# Altium PCB kipas.PcbDoc
Units mm, origin at the board's own origin, x right, y up, seen from the top; angles counter-clockwise.
Board outline 152.4 x 101.6 mm, 2 copper layers (Top Layer, Bottom Layer); 6 components, 15 nets, 23 pads, 0 vias.
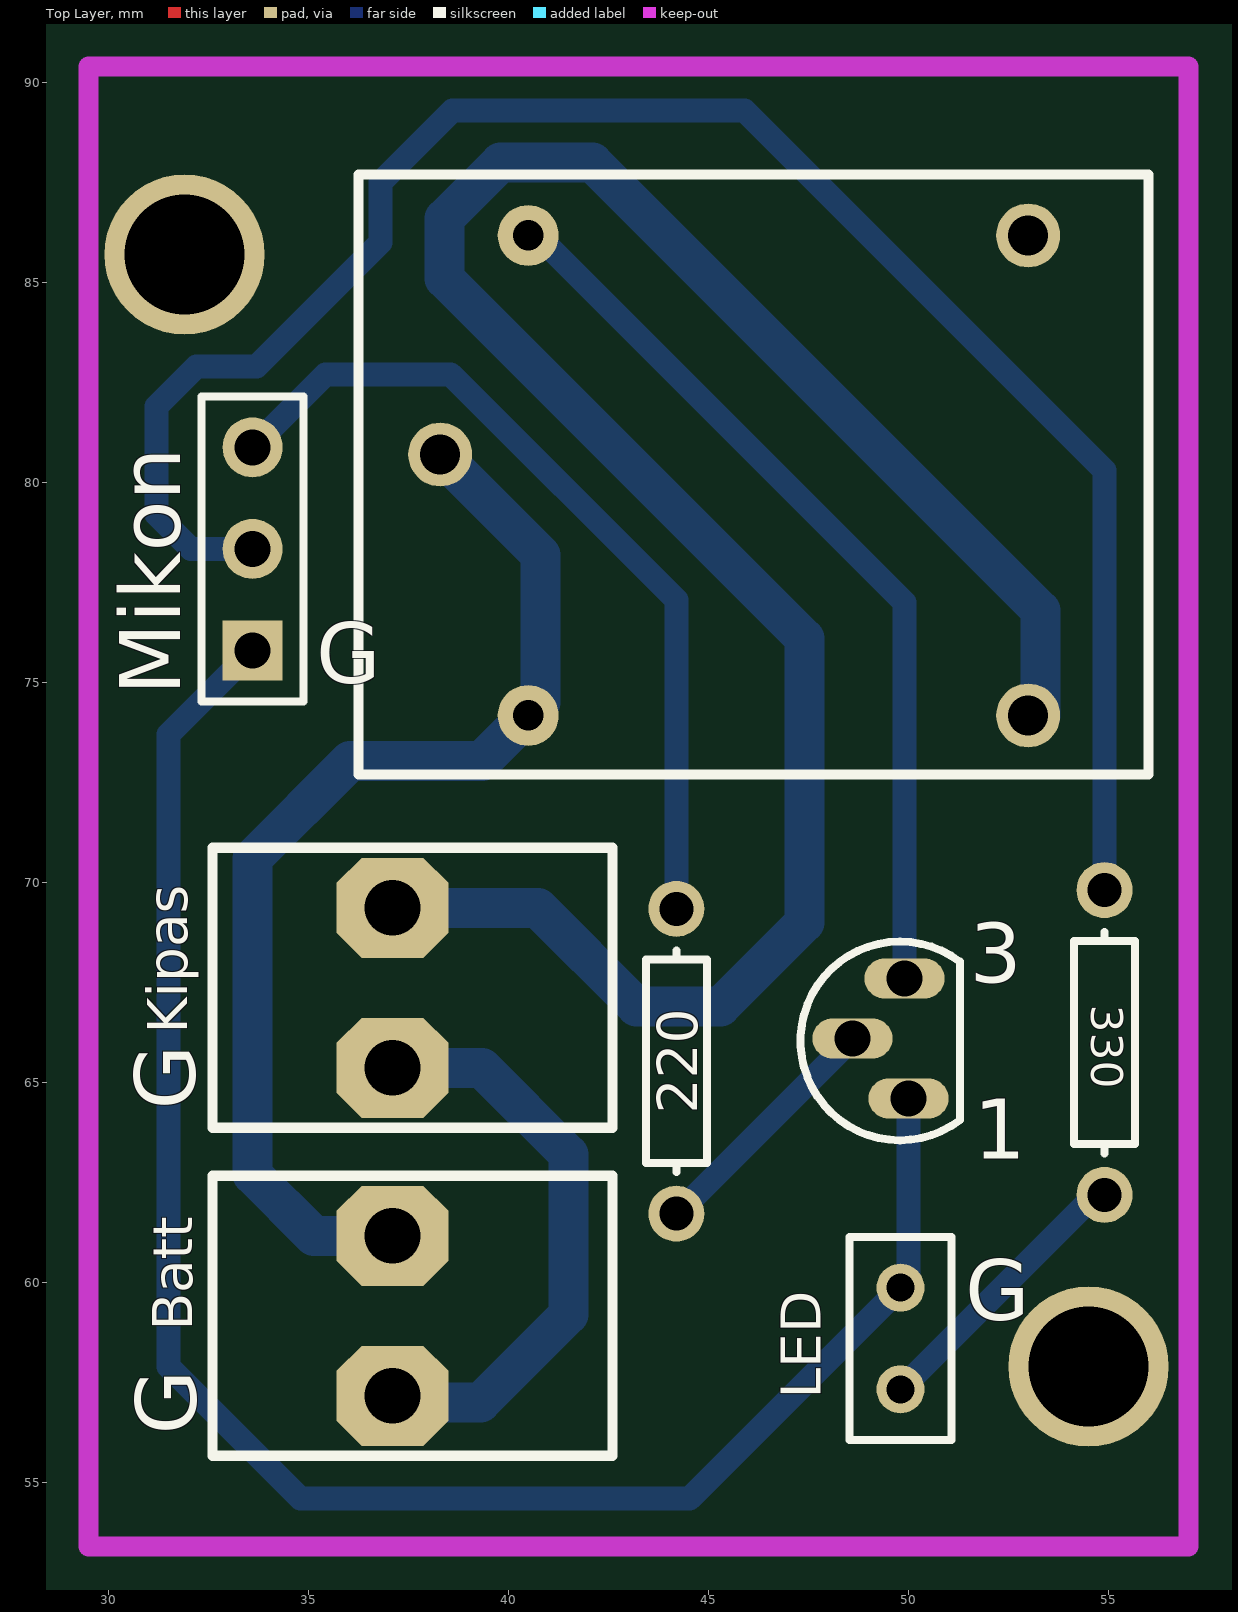
[diagram p0: Top Layer view]
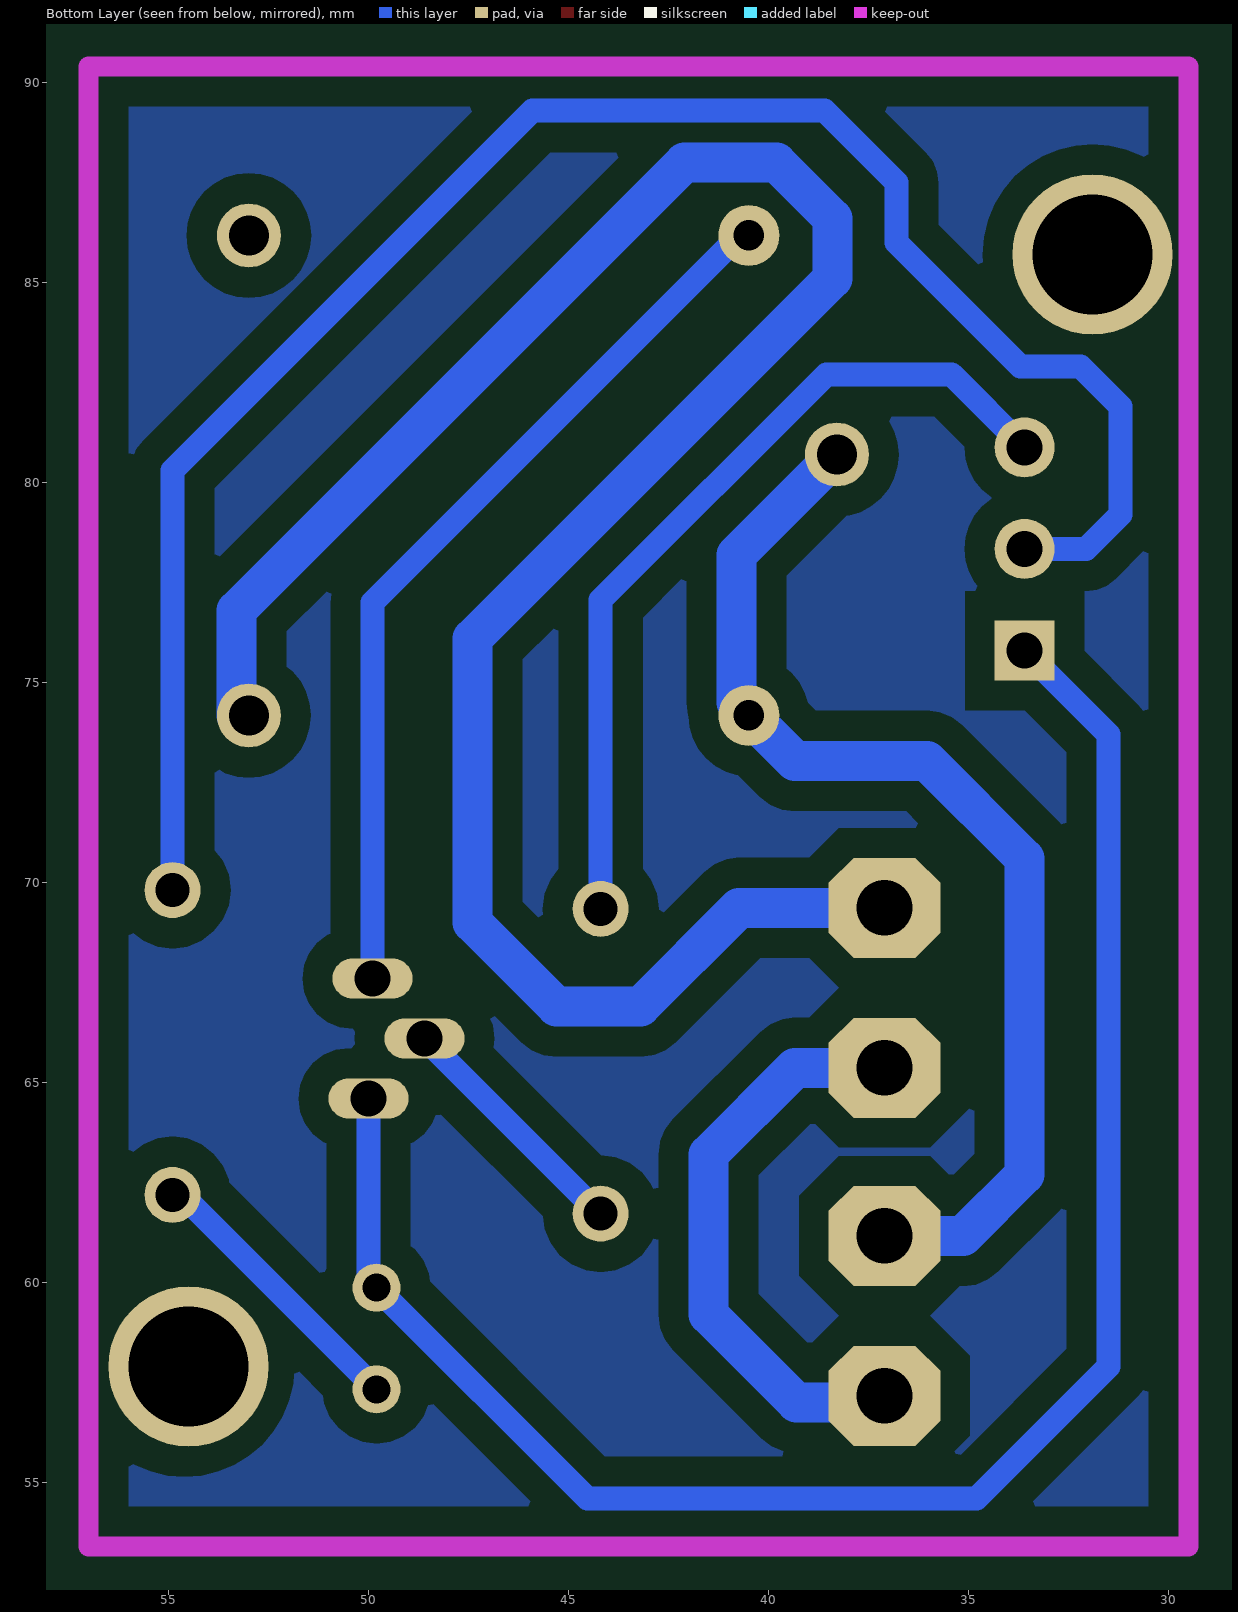
[diagram p1: Bottom Layer view, seen from below]

## Layer stack, top to bottom
Top Solder: solder mask 0.0102, Solder Resist, Dk 3.5
Top Layer: signal copper 0.0356
Dielectric1: dielectric 0.32, FR-4, Dk 4.8
Bottom Layer: signal copper 0.0356
Bottom Solder: solder mask 0.0102, Solder Resist, Dk 3.5

## Board outline
25.4,25.4 177.8,25.4 177.8,127 25.4,127

## Design rules (kind name [scope] priority, off if disabled: settings)
Clearance [All] p1: gap=0.5
PolygonConnect [All] p1: connectstyle=Relief reliefconductorwidth=0.254 reliefentries=4 polygonreliefangle="90 Angle" airgapwidth=0.254
RoutingVias [All] p1: holewidth=0.711 width=1.27 viastyle="Through Hole" minholewidth=0.711 minwidth=1.27 maxholewidth=0.711 maxwidth=1.27
SilkToSolderMaskClearance SilkscreenOverComponentPads [IsPad] p1: minsilkscreentomaskgap=0.254 clearancetoexposedcopper=TRUE
SolderMaskExpansion [All] p1: expansion=0.102
Width [All] p1: maxlimit=1 minlimit=0.6 preferedwidth=0.6 minimp=50.000000 maximp=50.000000 favimp=50.000000
28 further rules are at their usual default settings.

## Components (designator, comment, footprint, x,y, rotation, side; value= is the part's Value field where it differs from the comment)
220 "Res1" AXIAL-0.3 44.196,65.532 r270 top (schematic designator R1)
Batt "" BIGCON2 37.1,59.2 r90 top
Kipas "" BIGCON2 37.1,67.4 r90 top
LED "Comment" RAD-0.1 49.8,58.6 r90 top
Mikon "mikon-driver" HDR1X3 33.6,75.8 r90 top (schematic designator P2)
? "Comment" AXIAL-0.3 54.9,66 r90 top

## Footprints (in the part's own frame and the unit in brackets; to place one, negate y for a bottom-side part, rotate by r counter-clockwise, add the part's x,y. Pads: shape width x height; smd on the part's side, far side on the other; paste and mask are expansions set on the pad)
AXIAL-0.3 [mm] "Axial Device, Thru-Hole; 2 Leads; 0.3 in Pin Spacing"
  round 1.4 hole 0.85: 1(-3.81,0) 2(3.81,0)
  silkscreen extent -2.77,-0.76 2.77,0.76
BIGCON2 [mil]
  oct 98.42x110 hole 55: 1(-80,0) 2(77.48,0)
  silkscreen extent -139,-217 137,177
HDR1X3 [mm] "Connector; Header; 3 Position"
  rect 1.5x1.5 hole 0.9: 1(0,0)
  round 1.5 hole 0.9: 2(2.54,0) 3(5.08,0)
  silkscreen extent -1.27,-1.27 6.35,1.27
RAD-0.1 [mm] "Radial Cap, Thru-Hole; 2 Leads; 0.1 in Pin Spacing"
  round 1.2 hole 0.7: 1(-1.27,0) 2(1.27,0)
  silkscreen extent -2.54,-1.27 2.54,1.27

## Part data
220: "Resistor"
Mikon: library part "Header 5", "Header, 5-Pin"

## Free pads (board coordinates)
  round 4 hole 3: 0(31.9,85.7) 0(54.5,57.9)
  round 1.6 hole 1: 0(52.992,86.176) 1(52.992,74.176) 4(38.292,80.7)
  oval 2x1 hole 0.9: 1(50,64.6) 2(48.6,66.1) 3(49.9,67.6)
  round 1.524 hole 0.762: 2(40.492,74.176) 3(40.492,86.176)

## Nets (pads, with @x,y where several pads share a name; then routed paths per layer and width w, separated by ;. In a path a pad name is that pad's centre, name@x,y a point inside that pad or via, vN(x,y) a via of type N, cw(c..) or ccw(c..) an arc to the next point about the centre after c; other vN are vias at no path point)
GND: LED.2 Mikon.1 pad.1@50,64.6 | length 45.7
  Bottom Layer w0.6: Mikon.1 31.5,73.7 31.5,57.9 34.8,54.6 44.53,54.6 LED.2 50,60.07 50,64.6 pad.1@50.2,64.4
GND2: Batt.1 Kipas.1 | length 14.9
  Bottom Layer w1: Batt.1@37.1,57.768 37.868,57 39.3,57 41.5,59.2 41.5,63.2 39.332,65.368 Kipas.1
LED_1: ?.1 LED.1 | length 7.1
  Bottom Layer w0.6: LED.1 54.66,62.19 ?.1
NetK1_1: Kipas.2 pad.1@52.992,74.176 | length 57.1
  Bottom Layer w1: Kipas.2@37.985,69.368 Kipas.2 40.732,69.368 43.2,66.9 45.3,66.9 47.4,69 47.4,76.1 38.4,85.1 38.4,86.6 39.8,88 42.1,88 53.3,76.8 pad.1@53.3,74.176
NetK1_5: pad.3 | length 23.7
  Bottom Layer w0.254: pad.3@40.492,86.176 pad.3@40.492,86.636
  Bottom Layer w0.6: pad.3@40.378,86.522 49.9,77 pad.3@49.9,67.6 ; pad.3@40.492,85.836 pad.3@40.492,86.176
NetP2_3: 
NetP2_4: 
NetP2_5: 220.1 Mikon.3 | length 21.4
  Bottom Layer w0.6: Mikon.3 35.42,82.7 38.555,82.7 44.196,77.059 220.1
NetP3_4: 
NetP3_6: 
NetP3_7: 
NetP3_8: 
NetR1_2: 220.2 pad.2@48.6,66.1 | length 6.2
  Bottom Layer w0.6: 220.2 44.222,61.722 pad.2@48.6,66.1
VCC: ?.2 Mikon.2 | length 47.7
  Bottom Layer w0.6: Mikon.2@33.6,78.688 Mikon.2 32.06,78.34 31.2,79.2 31.2,81.9 32.2,82.9 33.7,82.9 36.8,86 36.8,87.5 38.6,89.3 45.9,89.3 54.9,80.3 ?.2
VCCB: Batt.2 pad.2@40.492,74.176 pad.4 | length 28.2
  Bottom Layer w1: Batt.2@37.032,61.7 Batt.2@37.1,61.768 ; Batt.2 35.132,61.168 33.6,62.7 33.6,70.6 36.04,73.04 39.34,73.04 40.8,74.5 40.8,78.192 pad.4

## Polygon pours and split planes (outlines as drawn)
no net on Bottom Layer "Bottom Layer-No Net" (solid, pour order 1000): 29.5,90.4 57,90.4 57,53.4 29.5,53.4

## Keep-outs
Keep-Out Layer:
  lines w0.5: 29.5,53.4 57,53.4 57,90.4 29.5,90.4 29.5,53.4

## Silkscreen, mask and mechanical layers (free items; w line width, h text height)
Top Overlay:
  lines w0.2: 51.284,64.06 cw(c49.784,66.04) 51.284,68.02 51.284,64.06
  lines w0.254: 36.25,72.7 56,72.7 56,87.7 36.25,87.7 36.25,72.7
  text "G" at 35.192,74.98 h1.52
  text "3" at 51.532,67.5 h1.5
  text "330" at 54.572,66.94 h0.8 r270
  text "G" at 32.168,64.32 h1.52 r90
  text "1" at 51.632,63.1 h1.5
  text "G" at 51.424,59.056 h1.52
  text "G" at 32.196,56.188 h1.52 r90
Mechanical 15:
  lines w0.1: 49.284,66.04 50.284,66.04 ; 49.784,65.54 49.784,66.54